# Altium PCB PCB Portable Caculator.PcbDoc
Units mil, origin at the board's own origin, x right, y up, seen from the top; angles counter-clockwise.
Board outline 5315 x 4025 mil, 2 copper layers (Top Layer, Bottom Layer); 53 components, 55 nets, 246 pads, 0 vias.
Unrouted connection lines stored in the file: 130.
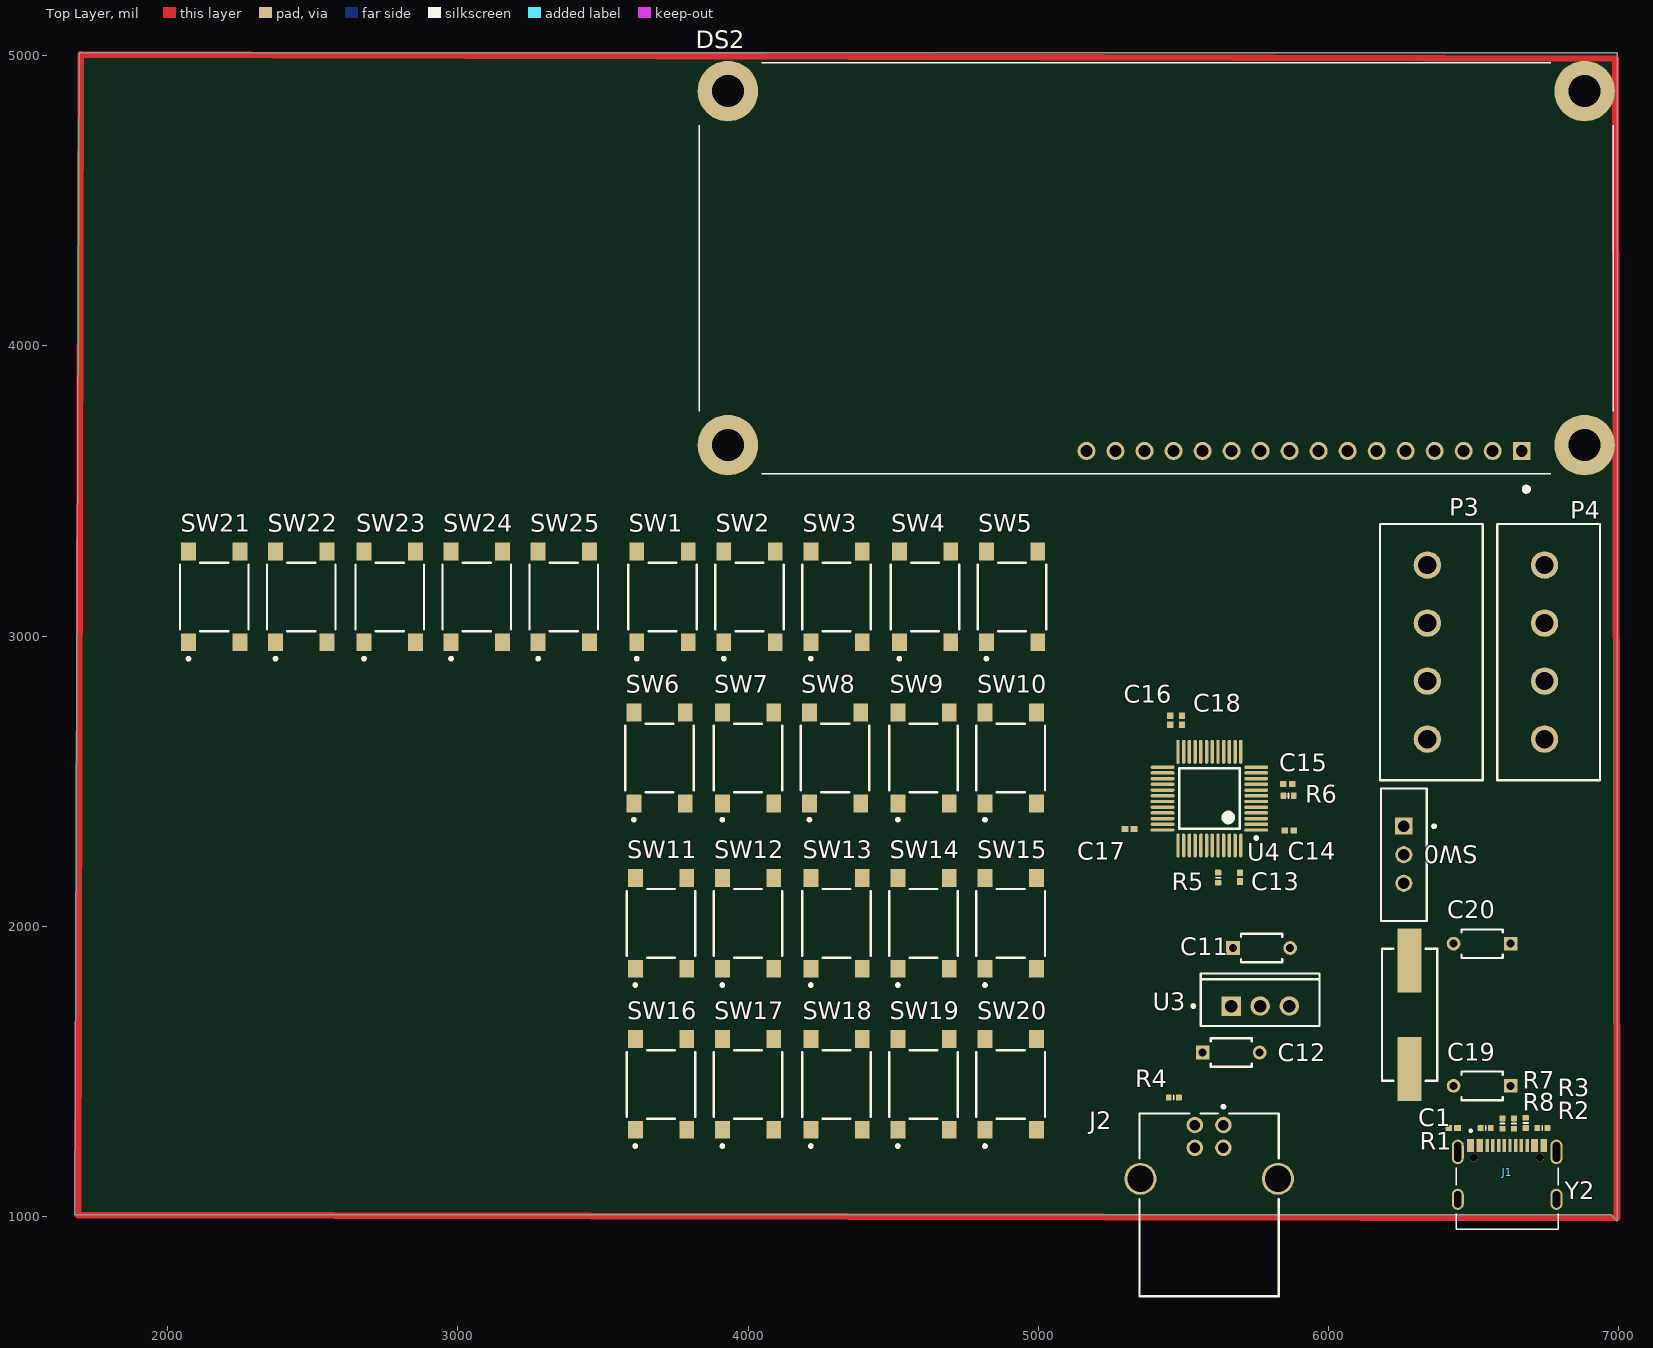
[diagram p0: Top Layer view]
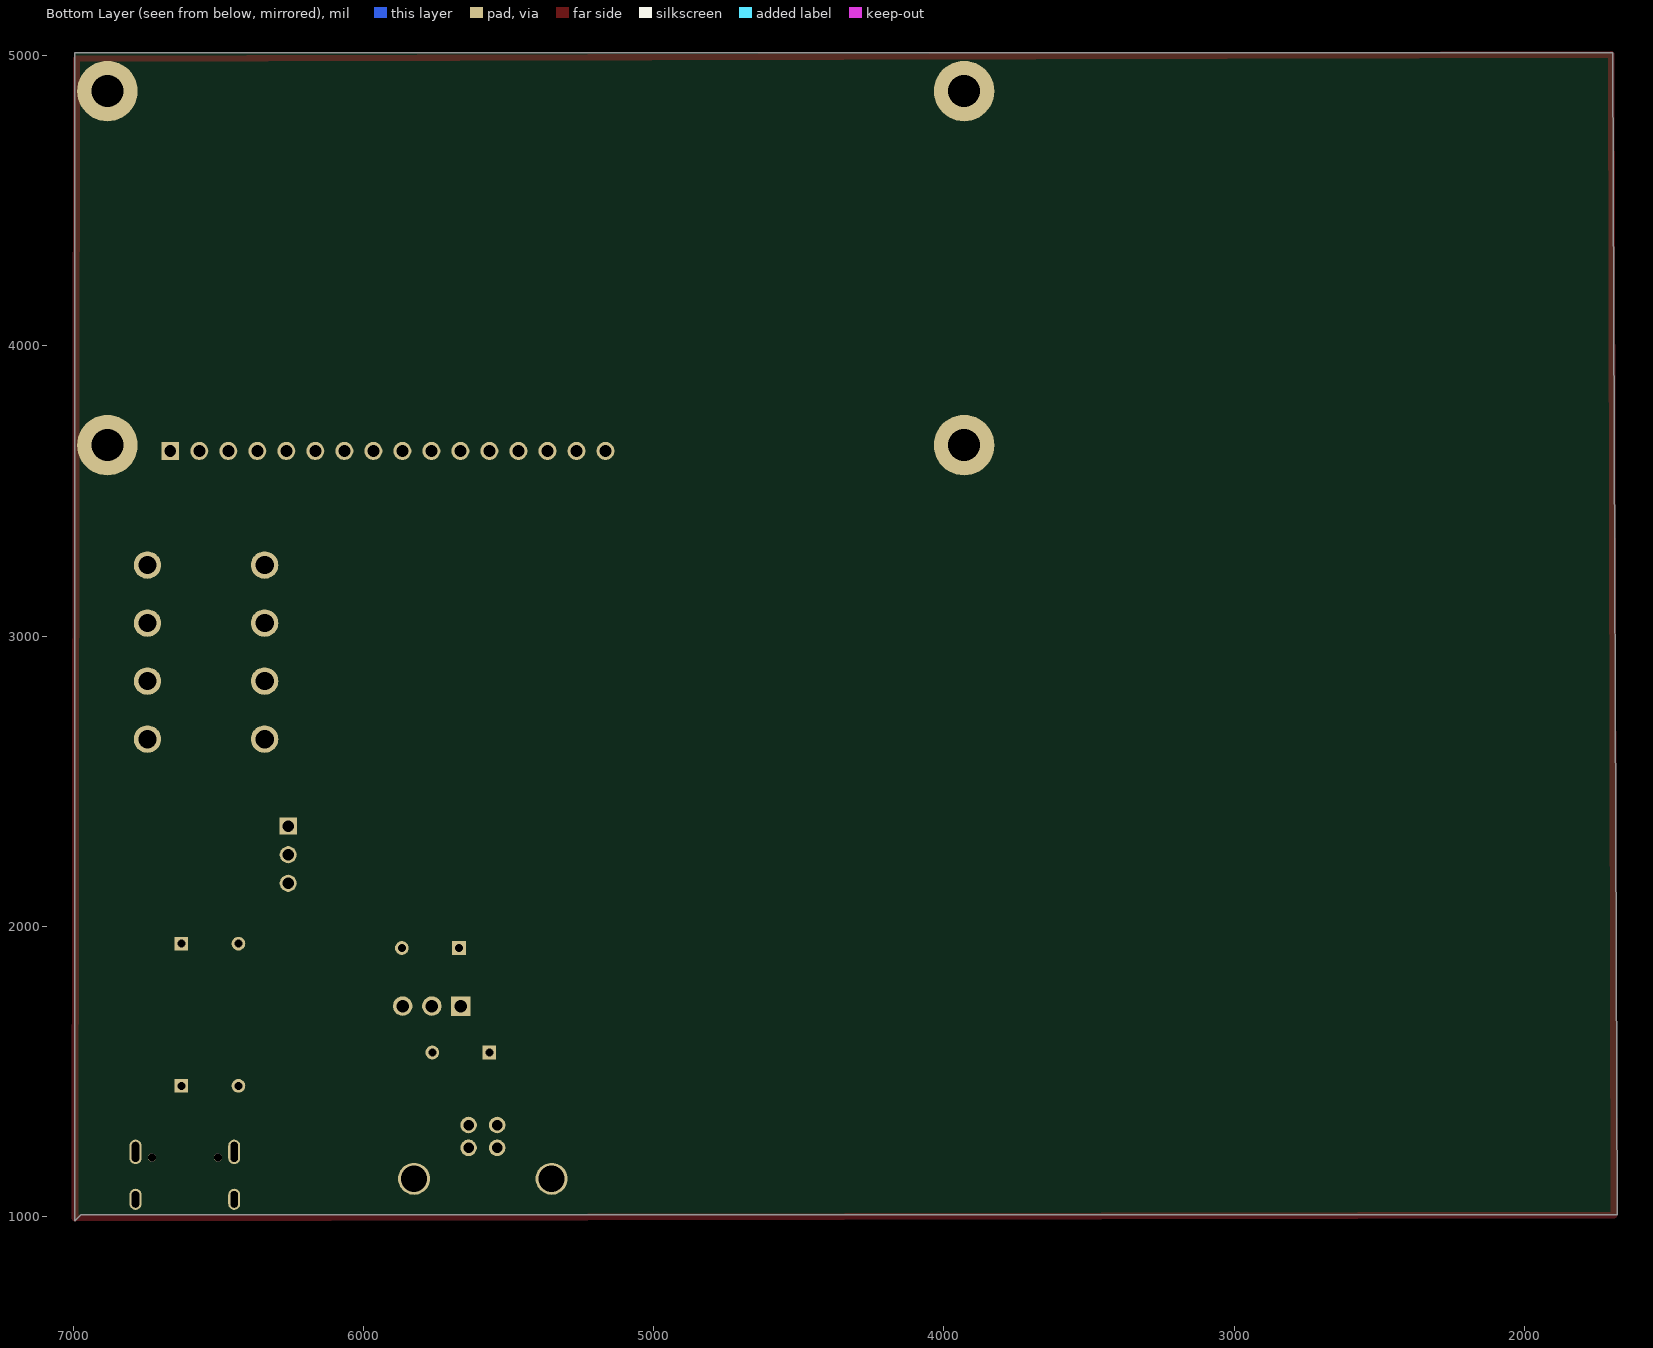
[diagram p1: Bottom Layer view, seen from below]

## Layer stack, top to bottom
Top Solder: solder mask 0.4, Solder Resist, Dk 3.5
Top Layer: signal copper 1.4
Dielectric 1: dielectric 12.6, FR-4, Dk 4.8
Bottom Layer: signal copper 1.4
Bottom Solder: solder mask 0.4, Solder Resist, Dk 3.5

## Board outline
1695,5010 6995,5010 6995,985 6975,1005 1680,1005

## Design rules (kind name [scope] priority, off if disabled: settings)
Clearance [All] p1: gap=10 ignorepadtopadclearanceinfootprint=FALSE
PolygonConnect [All] p1: connectstyle=Relief reliefconductorwidth=10 reliefentries=4 polygonreliefangle="90 Angle" airgapwidth=10
RoutingVias [All] p1: holewidth=28 width=50 viastyle="Through Hole" minholewidth=28 minwidth=50 maxholewidth=28 maxwidth=50
SolderMaskExpansion [All] p1: expansion=4 istentingtop=FALSE
SupplyNets "Schematic Supply Nets_3" [InNet('VBUS')] p1: voltage=0.000
SupplyNets "Schematic Supply Nets_1" [InNet('GND')] p2: voltage=0.000
SupplyNets "Schematic Supply Nets" [InNet('+3.3')] p3: voltage=0.000
Width [All] p1: maxlimit=10 minlimit=10 preferedwidth=10
30 further rules are at their usual default settings.

## Components (designator, comment, footprint, x,y, rotation, side; value= is the part's Value field where it differs from the comment)
C1 "Capacitor 0.1 uF +/- 5% 16 V 0402" CAPC1005X56X25LL10T15 6429.65,1305 r0 top value=1uF
C11 "22uF" FP-RCE0K1-MFG 5770,1925 r0 top
C12 "22uF" FP-RCE0K1-MFG 5665,1565 r0 top
C13 "Capacitor 0.1 uF +/- 5% 16 V 0402" CAPC1005X56X25LL10T15 5695,2169.65 r90 top value=100nF
C14 "Capacitor 0.1 uF +/- 5% 16 V 0402" CAPC1005X56X25LL10T15 5865.35,2330 r180 top value=100nF
C15 "Capacitor 0.1 uF +/- 5% 16 V 0402" CAPC1005X56X25LL10T15 5860.35,2490 r0 top value=100nF
C16 "Capacitor 0.1 uF +/- 5% 16 V 0402" CAPC1005X56X25LL10T15 5455,2710.35 r270 top value=100nF
C17 "Capacitor 0.1 uF +/- 5% 16 V 0402" CAPC1005X56X25LL10T15 5314.65,2335 r0 top value=100nF
C18 "Capacitor 0.1 uF +/- 5% 16 V 0402" CAPC1005X56X25LL10T15 5495,2710.35 r270 top value=1uF
C19 "22pF" FP-RCE0K1-MFG 6530,1450 r180 top
C20 "22pF" FP-RCE0K1-MFG 6530,1940 r180 top
DS2 "NHD-14432WG-BTFH-V#T" LCD_NHD-14432WG-BTFH-V#T 5385,4280 r180 top
J1 "USB Type-C" TYPE-C-16POS 6616.1,1058.98 r0 top
J2 "61729-1011BLF" FCI-61729-1011BLF_V 5589.21,1222.28 r0 top
P3 "691701510004B" 691701510004B 6355,2945 r270 top
P4 "691701510004B" 691701510004B 6758.78,2945 r270 top
R1 "Resistor 1K +/-5 % 0402 63 mW" RESC0402(1005)_L 6542.28,1305 r0 top value=5.1k
R2 "Resistor 1K +/-5 % 0402 63 mW" RESC0402(1005)_L 6737.28,1305 r180 top value=5.1k
R3 "Resistor 1K +/-5 % 0402 63 mW" RESC0402(1005)_L 6680,1322.28 r90 top value=1.5k
R4 "Resistor 1K +/-5 % 0402 63 mW" RESC0402(1005)_L 5467.28,1410 r180 top value=1k5
R5 "Resistor 1K +/-5 % 0402 63 mW" RESC0402(1005)_L 5620,2167.28 r90 top value=10k
R6 "Resistor 1K +/-5 % 0402 63 mW" RESC0402(1005)_L 5862.72,2450 r180 top value=10k
R7 "Resistor 1K +/-5 % 0402 63 mW" RESC0402(1005)_L 6640,1320 r270 top value=22
R8 "Resistor 1K +/-5 % 0402 63 mW" RESC0402(1005)_L 6600,1320 r270 top value=22
SW0 "EG1218" ESWI-EG1218_V 6260,2246.57 r270 top
SW1 "PTS645SM43SMTR92LFS" FP-PTS645SM43SMTR92LFS-MFG 3705,3135 r90 top
SW2 "PTS645SM43SMTR92LFS" FP-PTS645SM43SMTR92LFS-MFG 4005,3135 r90 top
SW3 "PTS645SM43SMTR92LFS" FP-PTS645SM43SMTR92LFS-MFG 4305,3135 r90 top
SW4 "PTS645SM43SMTR92LFS" FP-PTS645SM43SMTR92LFS-MFG 4610,3135 r90 top
SW5 "PTS645SM43SMTR92LFS" FP-PTS645SM43SMTR92LFS-MFG 4910,3135 r90 top
SW6 "PTS645SM43SMTR92LFS" FP-PTS645SM43SMTR92LFS-MFG 3695,2580 r90 top
SW7 "PTS645SM43SMTR92LFS" FP-PTS645SM43SMTR92LFS-MFG 4000,2580 r90 top
SW8 "PTS645SM43SMTR92LFS" FP-PTS645SM43SMTR92LFS-MFG 4300,2580 r90 top
SW9 "PTS645SM43SMTR92LFS" FP-PTS645SM43SMTR92LFS-MFG 4605,2580 r90 top
SW10 "PTS645SM43SMTR92LFS" FP-PTS645SM43SMTR92LFS-MFG 4905,2580 r90 top
SW11 "PTS645SM43SMTR92LFS" FP-PTS645SM43SMTR92LFS-MFG 3700,2010 r90 top
SW12 "PTS645SM43SMTR92LFS" FP-PTS645SM43SMTR92LFS-MFG 4000,2010 r90 top
SW13 "PTS645SM43SMTR92LFS" FP-PTS645SM43SMTR92LFS-MFG 4305,2010 r90 top
SW14 "PTS645SM43SMTR92LFS" FP-PTS645SM43SMTR92LFS-MFG 4605,2010 r90 top
SW15 "PTS645SM43SMTR92LFS" FP-PTS645SM43SMTR92LFS-MFG 4905,2010 r90 top
SW16 "PTS645SM43SMTR92LFS" FP-PTS645SM43SMTR92LFS-MFG 3700,1455 r90 top
SW17 "PTS645SM43SMTR92LFS" FP-PTS645SM43SMTR92LFS-MFG 4000,1455 r90 top
SW18 "PTS645SM43SMTR92LFS" FP-PTS645SM43SMTR92LFS-MFG 4305,1455 r90 top
SW19 "PTS645SM43SMTR92LFS" FP-PTS645SM43SMTR92LFS-MFG 4605,1455 r90 top
SW20 "PTS645SM43SMTR92LFS" FP-PTS645SM43SMTR92LFS-MFG 4905,1455 r90 top
SW21 "PTS645SM43SMTR92LFS" FP-PTS645SM43SMTR92LFS-MFG 2160,3135 r90 top
SW22 "PTS645SM43SMTR92LFS" FP-PTS645SM43SMTR92LFS-MFG 2460,3135 r90 top
SW23 "PTS645SM43SMTR92LFS" FP-PTS645SM43SMTR92LFS-MFG 2765,3135 r90 top
SW24 "PTS645SM43SMTR92LFS" FP-PTS645SM43SMTR92LFS-MFG 3065,3135 r90 top
SW25 "PTS645SM43SMTR92LFS" FP-PTS645SM43SMTR92LFS-MFG 3365,3135 r90 top
U3 "LD1117V33" STM-TO220-3 5765,1725 r90 top
U4 "STM32F103C8T6" STM-LQFP48_M 5590,2440 r180 top
Y2 "ABLS-8.000MHZ-B2-T" FP-ABLS-MFG 6280,1695 r90 top

## Footprints (in the part's own frame and the unit in brackets; to place one, negate y for a bottom-side part, rotate by r counter-clockwise, add the part's x,y. Pads: shape width x height; smd on the part's side, far side on the other; paste and mask are expansions set on the pad)
691701510004B [mm] "THR - 5,08mm - PCB Vertical Close - 04p"
  round 2.4 hole 1.6: 1(-7.62,-0.35) 2(-2.54,-0.35) 3(2.54,-0.35) 4(7.62,-0.35)
  silkscreen extent -11.21,-4.5 11.21,4.5, body extent -10.86,-4.25 10.86,4.25, height 12.1
CAPC1005X56X25LL10T15 [mm] "Chip Capacitor, 2-Leads, Body 1.10x0.60mm, IPC High Density"
  rect 0.58x0.54 smd: 1(-0.39,0) 2(0.39,0)
  body extent -0.55,-0.3 0.55,0.3, height 0.56
ESWI-EG1218_V [mm] "THD, 3-Leads, Body 11.6x4mm, Pitch 2.5mm"
  rect 1.5x1.5 hole 1: 1(-2.5,0)
  round 1.5 hole 1: 2(0,0) 3(2.5,0)
  silkscreen extent -5.8,-2 5.8,2.78, body extent -5.8,-2 5.8,2, height 7.4
FCI-61729-1011BLF_V [mm] "THD, 4-Leads, Body 16x12.2mm"
  round 1.45 hole 0.92: 1(1.25,2.355) 2(-1.25,2.355) 3(-1.25,0.355) 4(1.25,0.355)
  round 2.8 hole 2.3: 5(6.02,-2.355) 6(-6.02,-2.355)
  silkscreen extent -6.1,-12.63 6.1,4.09, body extent -6.56,-12.58 6.56,3.37, height 11
FP-ABLS-MFG [mm]
  rect 5.6x2.1 smd paste+0 mask+0: 1(-4.75,0) 2(4.75,0)
  silkscreen extent -5.77,-2.42 5.77,2.42, body extent -7.65,-2.52 7.65,2.52, height 0.25
FP-PTS645SM43SMTR92LFS-MFG [mm]
  rect 1.55x1.3 smd paste+0 mask+0: 1(-3.975,2.25) 2(3.975,2.25) 3(-3.975,-2.25) 4(3.975,-2.25)
  silkscreen extent -5.52,-3 3,3, body extent -4.85,-3.1 4.85,3.1, height 0.25
FP-RCE0K1-MFG [mm]
  rect 1.2x1.2 hole 0.7 paste-2539.97 mask+0: 1(-2.5,0)
  round 1.2 hole 0.7 paste-2539.97 mask+0: 2(2.5,0)
  silkscreen extent -1.8,-1.25 1.8,1.25, body extent -3.2,-1.35 3.2,1.35, height 0.25
LCD_NHD-14432WG-BTFH-V#T [mm]
  rect 1.575x1.575 / inner round 1.575 / far side rect 1.575x1.575 hole 1.05: 1(-32.55,16.3)
  round 1.575 hole 1.05: 2(-30.01,16.3) 3(-27.47,16.3) 4(-24.93,16.3) 5(-22.39,16.3) 6(-19.85,16.3) 7(-17.31,16.3) 8(-14.77,16.3) 9(-12.23,16.3) 10(-9.69,16.3) 11(-7.15,16.3) 12(-4.61,16.3) 13(-2.07,16.3) 14(0.47,16.3) 15(3.01,16.3) 16(5.55,16.3)
  round 5.3 hole 2.8: S1(-38.05,15.8) S2(-38.05,-15.2) S3(36.95,15.8) S4(36.95,-15.2)
  silkscreen extent -40.55,-17.7 39.45,19.85, body extent -40,-18 40,18, height 10.2
RESC0402(1005)_L [mm] "Chip Resistor, Body 1.0x0.5mm, IPC High Density"
  rrect25% 0.5x0.55 smd: 1(-0.45,0) 2(0.45,0)
  silkscreen extent 0,-0.2 0,0.2, body extent -0.5,-0.25 0.5,0.25, height 0.3
STM-LQFP48_M [mm] "QFP, 48-Leads, Body 7x7mm, Pitch 0.5mm, IPC Low Density"
  oval 2.1x0.3 smd: 1(-4.1,2.75) 2(-4.1,2.25) 3(-4.1,1.75) 4(-4.1,1.25) 5(-4.1,0.75) 6(-4.1,0.25) 7(-4.1,-0.25) 8(-4.1,-0.75) 9(-4.1,-1.25) 10(-4.1,-1.75) 11(-4.1,-2.25) 12(-4.1,-2.75) 25(4.1,-2.75) 26(4.1,-2.25) 27(4.1,-1.75) 28(4.1,-1.25) 29(4.1,-0.75) 30(4.1,-0.25) 31(4.1,0.25) 32(4.1,0.75) 33(4.1,1.25) 34(4.1,1.75) 35(4.1,2.25) 36(4.1,2.75)
  oval 0.3x2.1 smd: 13(-2.75,-4.1) 14(-2.25,-4.1) 15(-1.75,-4.1) 16(-1.25,-4.1) 17(-0.75,-4.1) 18(-0.25,-4.1) 19(0.25,-4.1) 20(0.75,-4.1) 21(1.25,-4.1) 22(1.75,-4.1) 23(2.25,-4.1) 24(2.75,-4.1) 37(2.75,4.1) 38(2.25,4.1) 39(1.75,4.1) 40(1.25,4.1) 41(0.75,4.1) 42(0.25,4.1) 43(-0.25,4.1) 44(-0.75,4.1) 45(-1.25,4.1) 46(-1.75,4.1) 47(-2.25,4.1) 48(-2.75,4.1)
  silkscreen extent -4.23,-2.65 2.65,3.57, body extent -3.5,-3.5 3.5,3.5, height 1.6
STM-TO220-3 [mm] "FM, 3-Leads, Body 10.4x4.6mm, Pitch 2.55mm"
  rect 1.7x1.7 hole 1.1: 1(0,2.55)
  round 1.7 hole 1.1: 2(0,0) 3(0,-2.55)
  silkscreen extent -1.74,-5.2 2.86,5.97, body extent -1.74,-5.2 2.86,5.2, height 19.68
TYPE-C-16POS [mm]
  rect 0.6x1.15 smd: A1_B12(-3.2,4.725) A4_B9(-2.4,4.725) A9_B4(2.4,4.725) A12_B1(3.2,4.725)
  rect 0.3x1.15 smd: A5(-1.25,4.725) A6(-0.25,4.725) A7(0.25,4.725) A8(1.25,4.725) B5(1.75,4.725) B6(0.75,4.725) B7(-0.75,4.725) B8(-1.75,4.725)
  oval 1.05x1.85 hole 0.65 slot 1.45 at 90 deg: SH1(-4.32,0) SH2(4.32,0)
  oval 1.05x2.15 hole 0.65 slot 1.75 at 90 deg: SH3(-4.32,4.15) SH4(4.32,4.15)
  round 0.7 hole 0.7 unplated: ""(-2.89,3.65) ""(2.89,3.65)
  silkscreen extent -4.47,-2.6 4.47,6.1, body extent -4.47,-2.76 4.47,5.05, height 3.41

## Part data
C1 C13 C14 C15 C16 C17 C18: library part CMP-001-00001-6, "Chip Capacitor, 0.1 uF, +/- 5%, 16 V, 0402 (1005 Metric)", Capacitor Type=Ceramic, Case/Package=0402, Max Operating Temperature=125°C, Min Operating Temperature=-55°C, Tolerance=5%, Voltage Rating=16V, Mounting Technology=SM, Pins=2, RoHS Compliant=True
C11 C12: library part CMP-06035-047580-1, "Cap Ceramic 22pF 50V C0G ±5% Radial 5mm +125°C Automotive Bulk", Capacitance=22pF, Case/Package=Radial, Dielectric=C0G, Max Operating Temperature=125°C, Min Operating Temperature=-55°C, Package Quantity=500, Ratings=AEC-Q200, Resistor Type=Ceramic, Tolerance=5%, Voltage Rating=50V, Height=3.5mm, Height - Seated (Max)=0.138inch, Lead Diameter=0.5mm, Lead Pitch=0.197inch, Lead/Base Style="Formed Leads", Length=0.142inch, Mount="Through Hole", Packaging=Bulk, Termination=Radial, Voltage Rating (DC)=50V, Width=0.098inch
C19 C20: library part CMP-06035-047580-1, "Cap Ceramic 22pF 50V C0G ±5% Radial 5mm +125°C Automotive Bulk", Case/Package=Radial, Dielectric=C0G, Max Operating Temperature=125°C, Min Operating Temperature=-55°C, Package Quantity=500, Ratings=AEC-Q200, Resistor Type=Ceramic, Tolerance=5%, Voltage Rating=50V, Capacitance=22pF, Height=3.5mm, Height - Seated (Max)=0.138inch, Lead Diameter=0.5mm, Lead Pitch=0.197inch, Lead/Base Style="Formed Leads", Length=0.142inch, Mount="Through Hole", Packaging=Bulk, Termination=Radial, Voltage Rating (DC)=50V, Width=0.098inch
DS2: library part CMP-007-00039-1, "- Graphic LCD Display Module Transflective Black (White - Inverted) FSTN - Film Super-Twisted Nematic Parallel, 8-Bit - 144 x 32", Case/Package=None, Availability="In Stock", Check_prices=https://www.snapeda.com/parts/NHD-14432WG-BTFH-V%23T/Newhaven+Display+Intl/view-part/?ref=eda, Component Type=Standard, Design Item ID=NHD-14432WG-BTFH-V#T, MF="Newhaven Display", MP=NHD-14432WG-BTFH-V#T, Pins=20, Price=None, Purchase-URL=https://pricing.snapeda.com/search/part/NHD-14432WG-BTFH-V#T/?ref=eda, SnapEDA_Link=https://www.snapeda.com/parts/NHD-14432WG-BTFH-V%23T/Newhaven+Display+Intl/view-part/?ref=snap, Source=NHD-14432WG-BTFH-V#T.SchLib
J2: library part CMP-002-00041-2, "USB Receptacle B Type, Right Angle, 4 Position, Height 11.5 mm,-40 to 85 degC, RoHS, Tube", Colour=Black, Current Rating=1.5A, Manufacturer="FCI Electronics", Max Operating Temperature=40°C, Min Operating Temperature=0°C, Package Description="4-Pin Through Hole Device, Body 16 x 12.2 mm", Package Quantity=44, Case/Package=61729-1011BLF, Connector Type=USB, Contact Material=Copper, Contact Plating=Nickel, Datasheet URL=http://portal.fciconnect.com/Comergent/fci/drawing/61729.pdf, Datasheet Version="Rev. W, 05/2014", Gender=Female, Lead Pitch=2.5mm, Manufacturer URL=http://portal.fciconnect.com/, Mounting Technology=TH, Package Reference=61729-1011BLF, Packaging=Rail/Tube, Pins=4, RoHS Compliant=True
P3 P4: library part CMP-1502-02331-3, "Terminal Block, 5.08MM, Close Vertical Pcb Header, Thr Type, 4 Pins", Color=Black, Current Rating=10A, Max Operating Temperature=105°C, Min Operating Temperature=-40°C, Voltage Rating=300V, Connector Type="Terminal Block", Contact Material=Brass, Contact Plating=Tin, Gender=Male, Housing Material=Polymer, Lead Pitch=5.08mm, Length=23.12mm, Mount="Through Hole", Number of Contacts=4, Number of Pins=4, Pitch=5.08mm, REACH SVHC=Unknown, RoHS=Compliant, Termination=PCB
R1 R2 R3 R4 R5 R6 R7 R8: library part CMP-009-00157-3, "Chip Resistor, 1 kOhms, +/-5 %, 63 mW, -55 to 155 degC, 0402", Case/Package=0402, Max Operating Temperature=155°C, Min Operating Temperature=-55°C, Power=63mW, Tolerance=5%, Pins=2
SW0: library part CMP-011-00006-2, "Slide Switch, SPDT, 500 V, -20 to 70 degC, 3-Pin THD, RoHS, Bulk", Contact Current Rating=200mA, Manufacturer=E-Switch, Max Operating Temperature=70°C, Min Operating Temperature=-20°C, Operating Force=250gf, Package Description="3-Pin Through Hole Device, Body 11.6 x 4 mm, Pitch 2.5 mm", Package Quantity=1000, Voltage Rating (AC)=30V, Case/Package=EG1218, Contact Finish=Silver, Contact Material=Copper, Contact Plating=Silver, Current Rating=200mA, Datasheet URL=https://www.e-switch.com/system/asset/product_line/data_sheet/119/EG.pdf, Datasheet Version=Oct-15, Manufacturer URL=http://www.e-switch.ch/en/, Mounting Technology=TH, Package Reference=EG1218, Packaging=Bulk, Pins=3, RoHS Compliant=True, Throw Configuration=SPDT, Voltage Rating (DC)=30V
SW1 SW2 SW3 SW4 SW5 SW6 SW7 SW8 SW9 SW10 SW11 SW12 SW13 SW14 SW15 SW16 SW17 SW18 SW19 SW20 SW21 SW22 SW23 SW24 SW25: library part CMP-2000-05160-2, "SWITCH TACTILE SPST-NO 0.05A 12V", Case/Package=SMD/SMT, Color=Black, Contact Resistance=100mR, Current Rating=50mA, Max Operating Temperature=60°C, Max Voltage Rating (DC)=12V, Min Operating Temperature=-20°C, Operating Force=160gf, Package Quantity=1, Actuator Length=0.85mm, Actuator Material=Nylon, Actuator Type=Standard, Contact Material=Silver, Contact Plating=Silver, Depth=9mm, Illumination Type=Non-Illuminated, Lead Free="Lead Free", Length=6mm, Max Current Rating=50mA, Mechanical Life=100000Cycles, Mount="Surface Mount", Orientation=Straight, Packaging="Tape and Reel", REACH SVHC="No SVHC", Switch Function=Off-Mom, Termination="Gull Wing", Throw Configuration=SPST, Voltage Rating (DC)=12V
U3: library part CMP-019-00020-3, "Low Drop Positive Voltage Regulator, 800 mA, Fixed 3.3 V Output, 0 to 125 degC, 3-Pin TO-220, RoHS, Tube", Case/Package=TO-220-3, Dropout Voltage=1.1V, Manufacturer=STMicroelectronics, Max Input Voltage=15V, Max Operating Temperature=125°C, Max Ouput Current=800mA, Min Input Voltage=4.4V, Min Operating Temperature=0°C, Min Supply Voltage=4.75V, Nominal Output Voltage=3.3V, Output Current=1.3A, Package Quantity=50, Power=12W, Datasheet URL=http://www.farnell.com/datasheets/1776449.pdf, Datasheet Version="Rev. A, 07/2003", Manufacturer URL=http://www.st.com/, Max Supply Voltage=15V, Output Voltage=3.3V, Outputs=1, Packaging=Rail/Tube, Pins=3, RoHS Compliant=True
U4: library part CMP-00001-1, "MCU 32-bit STM32F1 ARM Cortex M3 RISC 64KB Flash 2.5V/3.3V 48-Pin LQFP Tray", Case/Package=LQFP, Clock Frequency=16MHz, Frequency=72MHz, Manufacturer Package Identifier=ai14911d, Max Operating Temperature=85°C, Max Power Dissipation=363mW, Max Supply Current=50mA, Max Supply Voltage=3.6V, Min Operating Temperature=-40°C, Min Supply Voltage=2V, Nominal Supply Current=1.7µA, Operating Supply Voltage=3.3V, Temperature Grade=Industrial, ADC Channels (Resolution)="10-Ch 12-Bit", Address Bus Width=32b, China RoHS=Compliant, Core Architecture=ARM, Country of Origin=Malaysia, Data Bus Width=32b, Density=512kb, EEPROM Memory Size=0B, Export Control Classification Number (ECCN) Code=3A991.A.2, Flash Memory Size=64kB, Harmonized Tariff Schedule (HTS) Code=8542.31.00.25, Height=1.45mm, Height - Seated (Max)=1.6mm, Interface="CAN, USB", Introduction Date=2007-06-07, Lead Free="Lead Free", Length=7mm, Lifecycle Status=Production, Memory Format=FLASH, Memory Size=64kB, Mounting Technology="Surface Mount", Number of A/D Converters=2, Number of ADC Channels=10, Number of Bits=32, Number of Channels=10, Number of I2C Channels=2, Number of I/Os=37, Number of Interrupts=16, Number of Programmable I/O=48, Number of PWM Channels=1, Number of SPI Channels=2, Number of Terminals=48, Number of Timers/Counters=4, Number of USART Channels=3, Oscillator Type=Internal, Peripherals=POR, Pins=48, Radiation Hardening=No, RAM Size=20kB, REACH SVHC=Yes, RoHS=Compliant, Schedule B=8542310000, Terminal Pitch=500µm, Termination=SMD/SMT, Watchdog Timer=Yes, Width=7mm
Y2: library part CMP-27762-009874-1, "CRYSTAL 8.0000MHZ 18PF SMD", Case/Package=SMD/SMT, ESR (Equivalent Series Resistance)=80R, Frequency=8MHz, Frequency Stability=50ppm, Frequency Tolerance=20ppm, Load Capacitance=18pF, Max Operating Temperature=70°C, Min Operating Temperature=-20°C, Operating Frequency="8 MHz", Package Quantity=1000, Accuracy=20ppm, Contact Plating=Tin, Depth=4.7mm, Height=0.165inch, Lead Free="Lead Free", Length=11.4mm, Mount="Surface Mount", Number of Pins=2, Packaging="Tape and Reel", Radiation Hardening=No, REACH SVHC="No SVHC", Series=ABLS, Series Resistance=80R, Termination=SMD/SMT, Tolerance=20ppm, Width=4.7mm

## Nets (pads, with @x,y where several pads share a name; then routed paths per layer and width w, separated by ;. In a path a pad name is that pad's centre, name@x,y a point inside that pad or via, vN(x,y) a via of type N, cw(c..) or ccw(c..) an arc to the next point about the centre after c; other vN are vias at no path point)
+3.3: C12.2 C13.2 C14.2 C15.1 C16.2 C17.2 C18.2 DS2.2 P3.1 P4.1 R3.2 R4.2 SW0.3 U3.2 U4.1 U4.9 U4.24 U4.36 U4.48
BOOT0: R5.2 U4.44
C1: SW5.1 U4.29
C2: SW4.1 U4.30
C3: SW3.1 U4.31
C4: SW2.1 U4.32
C5: SW1.1 U4.33
D4: DS2.11 U4.25
D5: DS2.12 U4.26
D6: DS2.13 U4.27
D7: DS2.14 U4.28
D+: J2.3 R4.1 U4.46
D-: J2.2 U4.45
E: DS2.6 U4.21
GND: C1.1 C11.1 C12.1 C13.1 C14.1 C15.2 C16.1 C17.1 C18.1 C19.1 C20.1 DS2.1 DS2.3 DS2.5 J1.A1_B12 J1.A12_B1 J2.4 J2.5 J2.6 P3.4 P4.4 R1.1 R2.1 R5.1 SW0.1 U3.1 U4.8 U4.23 U4.35 U4.47
NetJ1_A6: J1.A6 J1.B6 R3.1 R7.2
NetJ1_A7: J1.A7 J1.B7 R8.2
NetJ1_B5: J1.B5 R2.2
NetR6_1: R6.1 SW0.2
NetSW1_2: SW1.2 SW6.1
NetSW2_2: SW2.2 SW7.1
NetSW3_2: SW3.2 SW8.1
NetSW4_2: SW4.2 SW9.1
NetSW5_2: SW5.2 SW10.1
NetSW6_2: SW6.2 SW11.1
NetSW7_2: SW7.2 SW12.1
NetSW8_2: SW8.2 SW13.1
NetSW9_2: SW9.2 SW14.1
NetSW10_2: SW10.2 SW15.1
NetSW11_2: SW11.2 SW16.1
NetSW12_2: SW12.2 SW17.1
NetSW13_2: SW13.2 SW18.1
NetSW14_2: SW14.2 SW19.1
NetSW15_2: SW15.2 SW20.1
NetSW16_2: SW16.2 SW21.1
NetSW17_2: SW17.2 SW22.1
NetSW18_2: SW18.2 SW23.1
NetSW19_2: SW19.2 SW24.1
NetSW20_2: SW20.2 SW25.1
NRST: R6.2 U4.7
OSC_IN: C19.2 U4.5 Y2.1
OSC_OUT: C20.2 U4.6 Y2.2
R1: SW1.3 SW2.3 SW3.3 SW4.3 SW5.3 U4.18
R2: SW6.3 SW7.3 SW8.3 SW9.3 SW10.3 U4.19
R3: SW11.3 SW12.3 SW13.3 SW14.3 SW15.3 U4.20
R4: SW16.3 SW17.3 SW18.3 SW19.3 SW20.3 U4.39
R5: SW21.3 SW22.3 SW23.3 SW24.3 SW25.3 U4.40
RS: DS2.4 U4.22
SWCLK: P3.3 U4.11
SWDIO: P3.2 U4.10
USART1_RX: P4.3 U4.13
USART1_TX: P4.2 U4.12
USB_DN: R8.1 U4.37
USB_DP: R7.1 U4.34
VBUS: C1.2 C11.2 J1.A4_B9 J1.A9_B4 J2.1 U3.3
pads on no net: DS2.7 DS2.8 DS2.9 DS2.10 DS2.15 DS2.16 DS2.S1 DS2.S2 DS2.S3 DS2.S4 J1. J1.A5 J1.A8 J1.B8 J1.SH1 J1.SH2 J1.SH3 J1.SH4 R1.2 SW1.4 SW2.4 SW3.4 SW4.4 SW5.4 SW6.4 SW7.4 SW8.4 SW9.4 SW10.4 SW11.4 SW12.4 SW13.4 SW14.4 SW15.4 SW16.4 SW17.4 SW18.4 SW19.4 SW20.4 SW21.2 SW21.4 SW22.2 SW22.4 SW23.2 SW23.4 SW24.2 SW24.4 SW25.2 SW25.4 U4.2 U4.3 U4.4 U4.14 U4.15 U4.16 U4.17 U4.38 U4.41 U4.42 U4.43
copper on no net: | length 18590
  Top Layer w23.62: 1690,1005 6995,995 6990,4990 1700,5005 1690,1005

## Text inside footprints (layer, text, board x,y; h text height)
J1: Mechanical 13 "PCB EDGE" at 6832.64,970.39 h32
P3: Assembly Notes "Stencil thickness : 120 μm" at 6146.3,3148 h39.37 r270
P4: Assembly Notes "Stencil thickness : 120 μm" at 6550.08,3148 h39.37 r270